# Altium PCB IRsensor_Relayx1_Controller.PcbDoc
Units mm, origin at the board's own origin, x right, y up, seen from the top; angles counter-clockwise.
Board outline 29.97 x 78.87 mm, 2 copper layers (Top Layer, Bottom Layer); 10 components, 8 nets, 26 pads, 0 vias.
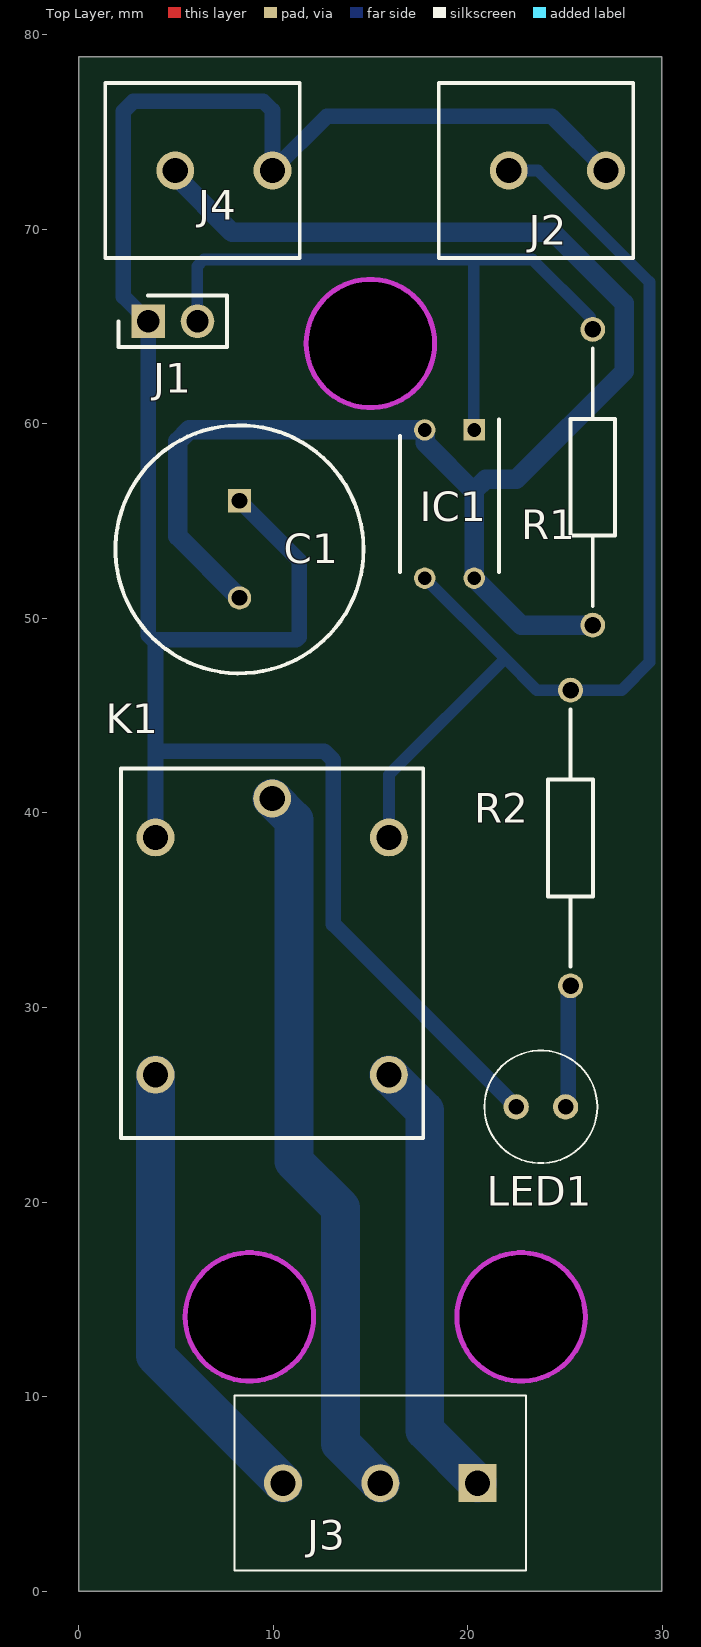
[diagram p0: Top Layer view]
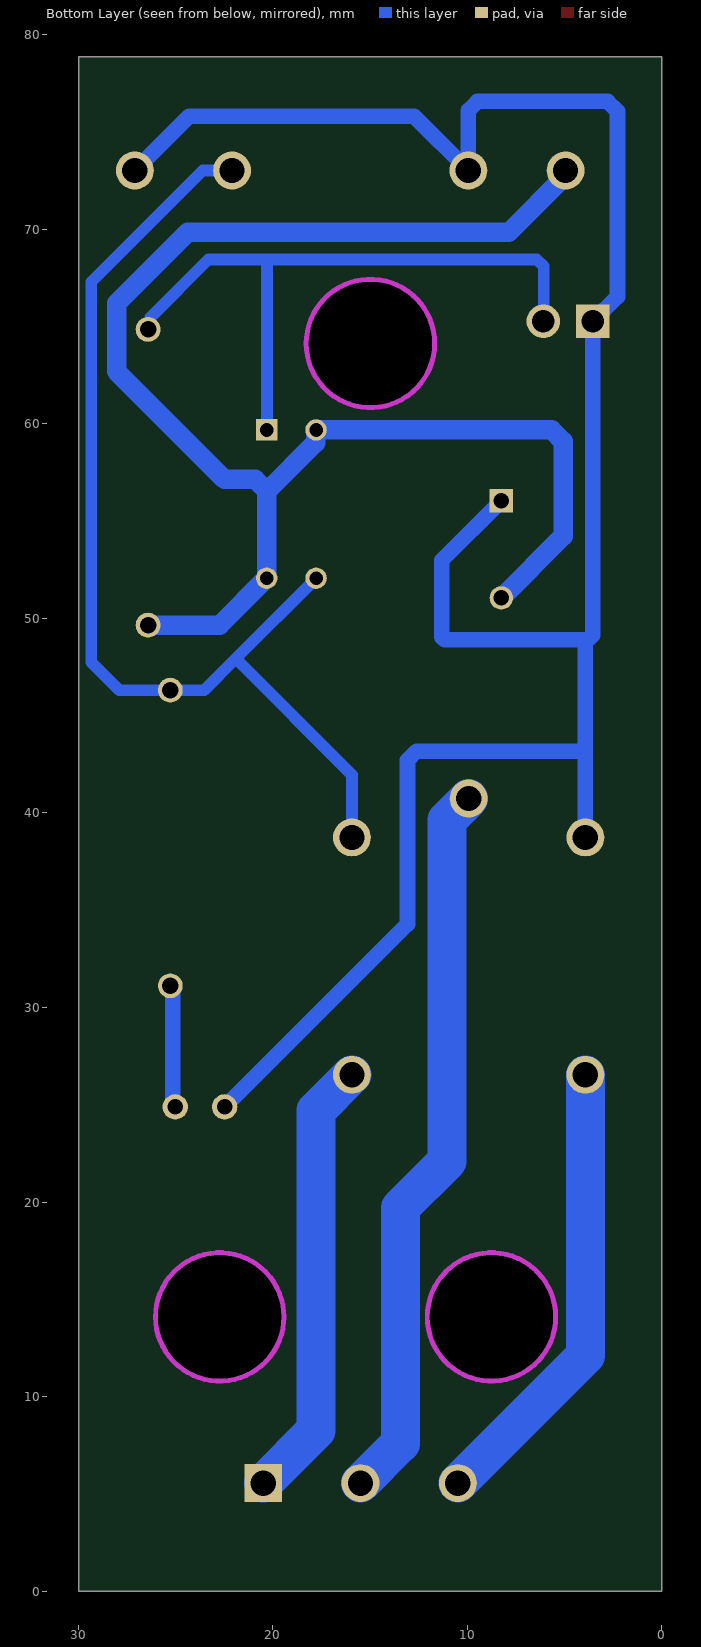
[diagram p1: Bottom Layer view, seen from below]
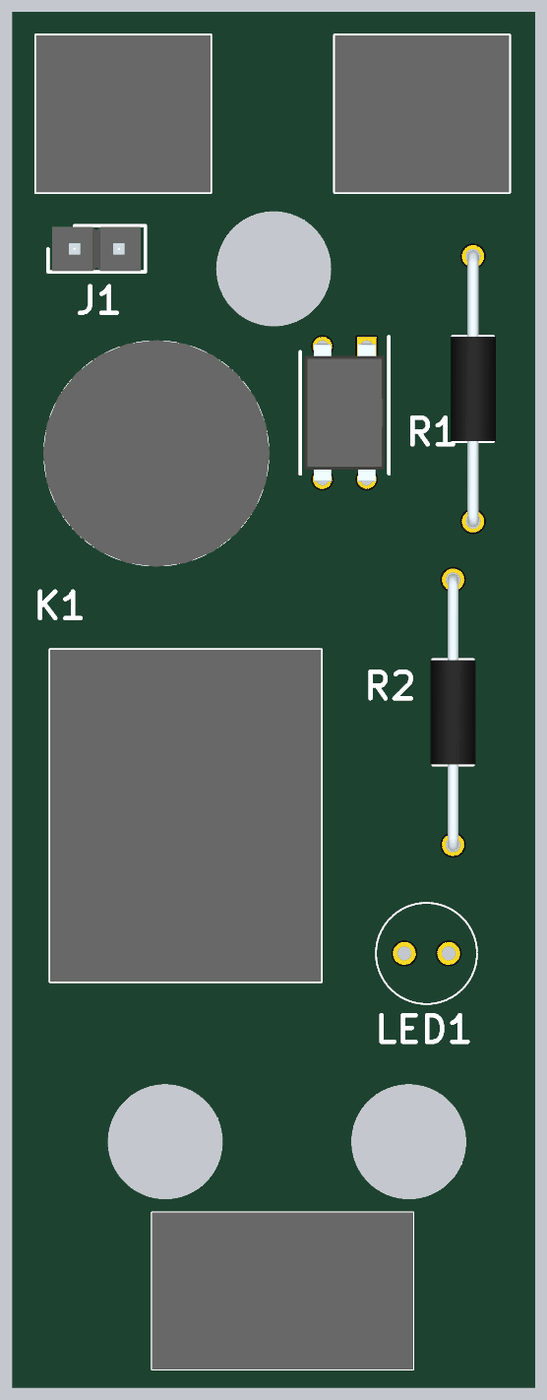
[diagram p2: 3D render of the assembled board from above, using the file's embedded part models]

## Layer stack, top to bottom
Top Solder: solder mask 0.0102, Solder Resist, Dk 3.5
Top Layer: signal copper 0.0356
Dielectric 1: dielectric 0.32, FR-4, Dk 4.8
Bottom Layer: signal copper 0.0356
Bottom Solder: solder mask 0.0102, Solder Resist, Dk 3.5

## Board outline
0,0 29.972,0 29.972,78.867 0,78.867
cut-out: 22.733,10.795 cw(c22.733,14.097) 19.431,14.097 cw(c22.733,14.097) 22.733,17.399 cw(c22.733,14.097) 26.035,14.097 cw(c22.733,14.097)
cut-out: 8.763,10.795 cw(c8.763,14.097) 5.461,14.097 cw(c8.763,14.097) 8.763,17.399 cw(c8.763,14.097) 12.065,14.097 cw(c8.763,14.097)
cut-out: 14.986,60.833 cw(c14.986,64.135) 11.684,64.135 cw(c14.986,64.135) 14.986,67.437 cw(c14.986,64.135) 18.288,64.135 cw(c14.986,64.135)

## Design rules (kind name [scope] priority, off if disabled: settings)
Clearance [All] p1: gap=0.254 ignorepadtopadclearanceinfootprint=FALSE except(0: Arc-Hole Track-Hole SMDPad-Hole THPad-Hole Via-Hole Fill-Hole Poly-Hole Region-Hole Text-Hole)
PolygonConnect [All] p1: connectstyle=Relief reliefconductorwidth=0.254 reliefentries=4 polygonreliefangle="90 Angle" airgapwidth=0.254
RoutingVias [All] p1: holewidth=0.711 width=1.27 viastyle="Through Hole" minholewidth=0.711 minwidth=1.27 maxholewidth=0.711 maxwidth=1.27
SolderMaskExpansion [All] p1: expansion=0.102 istentingtop=FALSE
Width [All] p1: maxlimit=2 minlimit=0.254 preferedwidth=0.254
30 further rules are at their usual default settings.

## Components (designator, comment, footprint, x,y, rotation, side; value= is the part's Value field where it differs from the comment)
C1 "UVR1H102MHD1TO" CAPPRD500W60D1275H2700 8.255,56.054 r270 top
IC1 "SFH617A-2X" DIP762W50P254L458H400Q4N 19.05,55.88 r270 top
J1 "M20-9990246" HDRV2W66P0X254_1X2_508X254X874P 3.556,65.278 r0 top
J2 "1935776" 1935776 22.098,73.025 r0 top
J3 "1935789" 1935789 20.494,5.55 r180 top
J4 "1935776" 1935776 4.953,73.025 r0 top
K1 "J107F1CS1224VDC.36" J107F1CS1224VDC36 3.937,38.743 r270 top
LED1 "C503B-RCN-CW0Z0AA1" C503BRCNCW0Z0AA1 22.479,24.892 r0 top
R1 "CF14JT10K0" RESAD1520W63L600D230 26.416,64.857 r270 top
R2 "CF14JT10K0" RESAD1520W63L600D230 25.273,31.115 r90 top

## Footprints (in the part's own frame and the unit in brackets; to place one, negate y for a bottom-side part, rotate by r counter-clockwise, add the part's x,y. Pads: shape width x height; smd on the part's side, far side on the other; paste and mask are expansions set on the pad)
1935776 [mm]
  round 1.95 hole 1.3: 1(0,0) 2(5,0)
  silkscreen extent -3.6,-4.5 6.4,4.5, body extent -3.6,-4.5 6.4,4.5, height 13.6
1935789 [mm]
  rect 1.95x1.95 hole 1.3: 1(0,0)
  round 1.95 hole 1.3: 2(5,0) 3(10,0)
  silkscreen extent -2.5,-4.5 12.5,4.5, body extent -2.5,-4.5 12.5,4.5, height 13.75
C503BRCNCW0Z0AA1 [mm]
  round 1.3 hole 0.8: 1(0,0) 2(2.54,0)
  silkscreen extent -1.63,-2.9 4.17,2.9
CAPPRD500W60D1275H2700 [mm]
  rect 1.2x1.2 hole 0.8: 1(0,0)
  round 1.2 hole 0.8: 2(5,0)
  silkscreen extent -3.87,-6.37 8.87,6.38, body extent -4,-6.5 9,6.5, height 27
DIP762W50P254L458H400Q4N [mm]
  rect 1.1x1.1 hole 0.7: 1(-3.81,1.27)
  round 1.1 hole 0.7: 2(-3.81,-1.27) 3(3.81,-1.27) 4(3.81,1.27)
  silkscreen extent -4.36,-2.54 3.5,2.54, body extent -3.94,-2.29 3.94,2.29, height 4
HDRV2W66P0X254_1X2_508X254X874P [mm]
  rect 1.725x1.725 hole 1.15: 1(0,0)
  round 1.725 hole 1.15: 2(2.54,0)
  silkscreen extent -1.52,-1.32 4.06,1.32, body extent -1.27,-1.27 3.81,1.27, height 8.74
J107F1CS1224VDC36 [mm]
  round 1.95 hole 1.3: 1(0,0) 2(0,12) 3(-2,6) 4(12.2,12) 5(12.2,0)
  silkscreen extent -3.55,-1.77 15.45,13.76, body extent -3.55,-1.77 15.45,13.76, height 15.39
RESAD1520W63L600D230 [mm]
  round 1.275 hole 0.85: 1(0,0) 2(15.2,0)
  silkscreen extent 0.99,-1.15 14.21,1.15, body extent -0.31,-1.3 15.52,1.3, height 2.59

## Part data
C1: "Capacitor Polarised", Manufacturer_Name=Nichicon, Mouser Part Number=647-UVR1H102MHD1T0, Arrow Part Number=UVR1H102MHD1TO, Arrow Price/Stock=https://www.arrow.com/en/products/uvr1h102mhd1to/nichicon, Datasheet Link=http://nichicon-us.com/english/products/pdfs/e-uvr.pdf, Height=27mm, Manufacturer_Part_Number=UVR1H102MHD1TO, Mouser Price/Stock=https://www.mouser.co.uk/ProductDetail/Nichicon/UVR1H102MHD1TO?qs=Wu4QelNNmeNg4t%252BBksLOmQ%3D%3D
IC1: "Integrated Circuit", Manufacturer_Name=Isocom, Datasheet Link=http://www.farnell.com/datasheets/91023.pdf?_ga=2.50651689.1688980470.1514904698-1411154270.1472651675, Height=4mm, Manufacturer_Part_Number=SFH617A-2X
J1: "Connector", Manufacturer_Name=Harwin, Mouser Part Number=855-M20-9990246, Datasheet Link=https://cdn.harwin.com/pdfs/M20-999.pdf, Height=8.74mm, Manufacturer_Part_Number=M20-9990246, Mouser Price/Stock=https://www.mouser.co.uk/ProductDetail/Harwin/M20-9990246?qs=Jph8NoUxIfWjw4WmyRvzag%3D%3D
J2 J4: "Connector", Manufacturer_Name="Phoenix Contact", Mouser Part Number=651-1935776, Arrow Part Number=1935776, Arrow Price/Stock=https://www.arrow.com/en/products/1935776/phoenix-contact?region=nac, Datasheet Link=https://datasheet.datasheetarchive.com/originals/distributors/Datasheets-DGA18/1075322.pdf, Height=13.5mm, Manufacturer_Part_Number=1935776, Mouser Price/Stock=https://www.mouser.co.uk/ProductDetail/Phoenix-Contact/1935776?qs=gjk32EaArKJ3oesOAo3TWA%3D%3D
J3: "Connector", Manufacturer_Name="Phoenix Contact", Mouser Part Number=651-1935789, Arrow Part Number=1935789, Arrow Price/Stock=https://www.arrow.com/en/products/1935789/phoenix-contact?region=nac, Datasheet Link=https://www.phoenixcontact.com/online/portal/us?uri=pxc-oc-itemdetail:pid=1935789&library=usen&tab=1, Height=13.65mm, Manufacturer_Part_Number=1935789, Mouser Price/Stock=https://www.mouser.co.uk/ProductDetail/Phoenix-Contact/1935789?qs=Acf35Ay%2FzLfkp38c%252B1VczQ%3D%3D
K1: "Relay or Contactor", Manufacturer_Name=CIT, Datasheet Link=https://www.citrelay.com/Catalog%20Pages/RelayCatalog/J107F.pdf, Height=15.29mm, Manufacturer_Part_Number=J107F1CS1224VDC.36
LED1: "LED", Manufacturer_Name=Cree, Mouser Part Number=941-C503BRCNCW0Z0AA1, Arrow Part Number=C503B-RCN-CW0Z0AA1, Arrow Price/Stock=https://www.arrow.com/en/products/c503b-rcn-cw0z0aa1/cree, Datasheet Link=https://www.cree.com/led-components/media/documents/C503B-RAS-RAN-AAS-AAN-RBS-RBN-ABS-ABN-RCS-RCN-ACS-ACN-1079.pdf, Manufacturer_Part_Number=C503B-RCN-CW0Z0AA1, Mouser Price/Stock=https://www.mouser.com/Search/Refine.aspx?Keyword=941-C503BRCNCW0Z0AA1
R1 R2: "Resistor", Manufacturer_Name="Stackpole Electronics Inc.", Arrow Part Number=CF14JT10K0, Arrow Price/Stock=https://www.arrow.com/en/products/cf14jt10k0/stackpole-electronics?region=nac, Datasheet Link=https://www.seielect.com/catalog/sei-cf_cfm.pdf, Manufacturer_Part_Number=CF14JT10K0

## Nets (pads, with @x,y where several pads share a name; then routed paths per layer and width w, separated by ;. In a path a pad name is that pad's centre, name@x,y a point inside that pad or via, vN(x,y) a via of type N, cw(c..) or ccw(c..) an arc to the next point about the centre after c; other vN are vias at no path point)
GND: C1.2 IC1.2 IC1.4 J4.1 R1.2 | length 77.9
  Bottom Layer w1: J4.1 4.953,72.771 7.874,69.85 24.384,69.85 28.034,66.2 28.034,62.705 22.479,57.15 20.906,57.15 20.32,56.564 20.32,56.515 ; C1.2 5.08,54.229 5.08,59.104 5.666,59.69 IC1.2 17.799,59.671 17.799,59.036 20.32,56.515 ; R1.2 22.733,49.657 IC1.4 20.32,56.515
NetIC1_1: IC1.1 J1.2 R1.1 | length 33.9
  Bottom Layer w0.6: J1.2 6.082,65.292 6.082,68.102 6.433,68.453 20.306,68.453 ; IC1.1 20.306,59.704 20.306,68.453 ; R1.1 26.287,64.986 26.287,65.48 23.314,68.453 20.306,68.453
NetIC1_3: IC1.3 J2.1 K1.2 R2.2 | length 55.4
  Bottom Layer w0.6: K1.2 15.937,41.972 21.907,47.942 ; IC1.3 21.907,47.942 ; J2.1 23.598,73.025 29.329,67.294 29.329,47.744 27.9,46.315 R2.2 23.535,46.315 21.907,47.942
NetJ3_1: J3.1 K1.4 | length 22.9
  Bottom Layer w2: K1.4 17.78,24.7 17.78,8.264 J3.1
NetJ3_2: J3.2 K1.3 | length 37.5
  Bottom Layer w2: K1.3 11.049,39.631 11.049,22.098 13.446,19.701 13.446,7.598 J3.2
NetJ3_3: J3.3 K1.5 | length 23.7
  Bottom Layer w2: K1.5 3.937,12.107 J3.3
NetLED1_2: LED1.2 R2.1 | length 6.3
  Bottom Layer w0.8: LED1.2 25.146,25.019 25.146,30.988 R2.1
VCC: C1.1 J1.1 J2.2 J4.2 K1.1 LED1.1 | length 115.5
  Bottom Layer w0.8: K1.1 3.937,43.18 ; C1.1 11.325,52.984 11.325,49.044 11.176,48.895 3.81,48.895 ; LED1.1 13.081,34.29 13.081,42.711 12.612,43.18 3.937,43.18 ; J2.2 24.304,75.819 12.747,75.819 J4.2 9.953,76.112 9.484,76.581 2.794,76.581 2.286,76.073 2.286,66.548 J1.1 3.556,49.149 3.81,48.895 ; 3.81,48.895 3.937,48.768 3.937,43.18

## Keep-outs
Keep-Out Layer:
  circle w0.254: c22.733,14.097 r3.302
  circle w0.254: c8.763,14.097 r3.302
  circle w0.254: c14.986,64.135 r3.302